# Altium PCB Sinistro_CLK_RevA.PcbDoc (part 4 of 6)
Units mil, origin at the board's own origin, x right, y up, seen from the top; angles counter-clockwise.
Board outline 5905.51 x 4330.71 mil, 10 copper layers (Top Layer (.GTL), MidLayer1 (*.G1), +12V (*.GP1), -12V (*.GP2), A & GND (*.GP3), Chassis E (*.GP4), +28V & VCC (*.GP5), MidLayer2 (*.G2), MidLayer3 (*.G3), Bottom Layer (.GBL)), stack 64.6 mil thick; 481 components, 323 nets, 1881 pads, 926 vias.
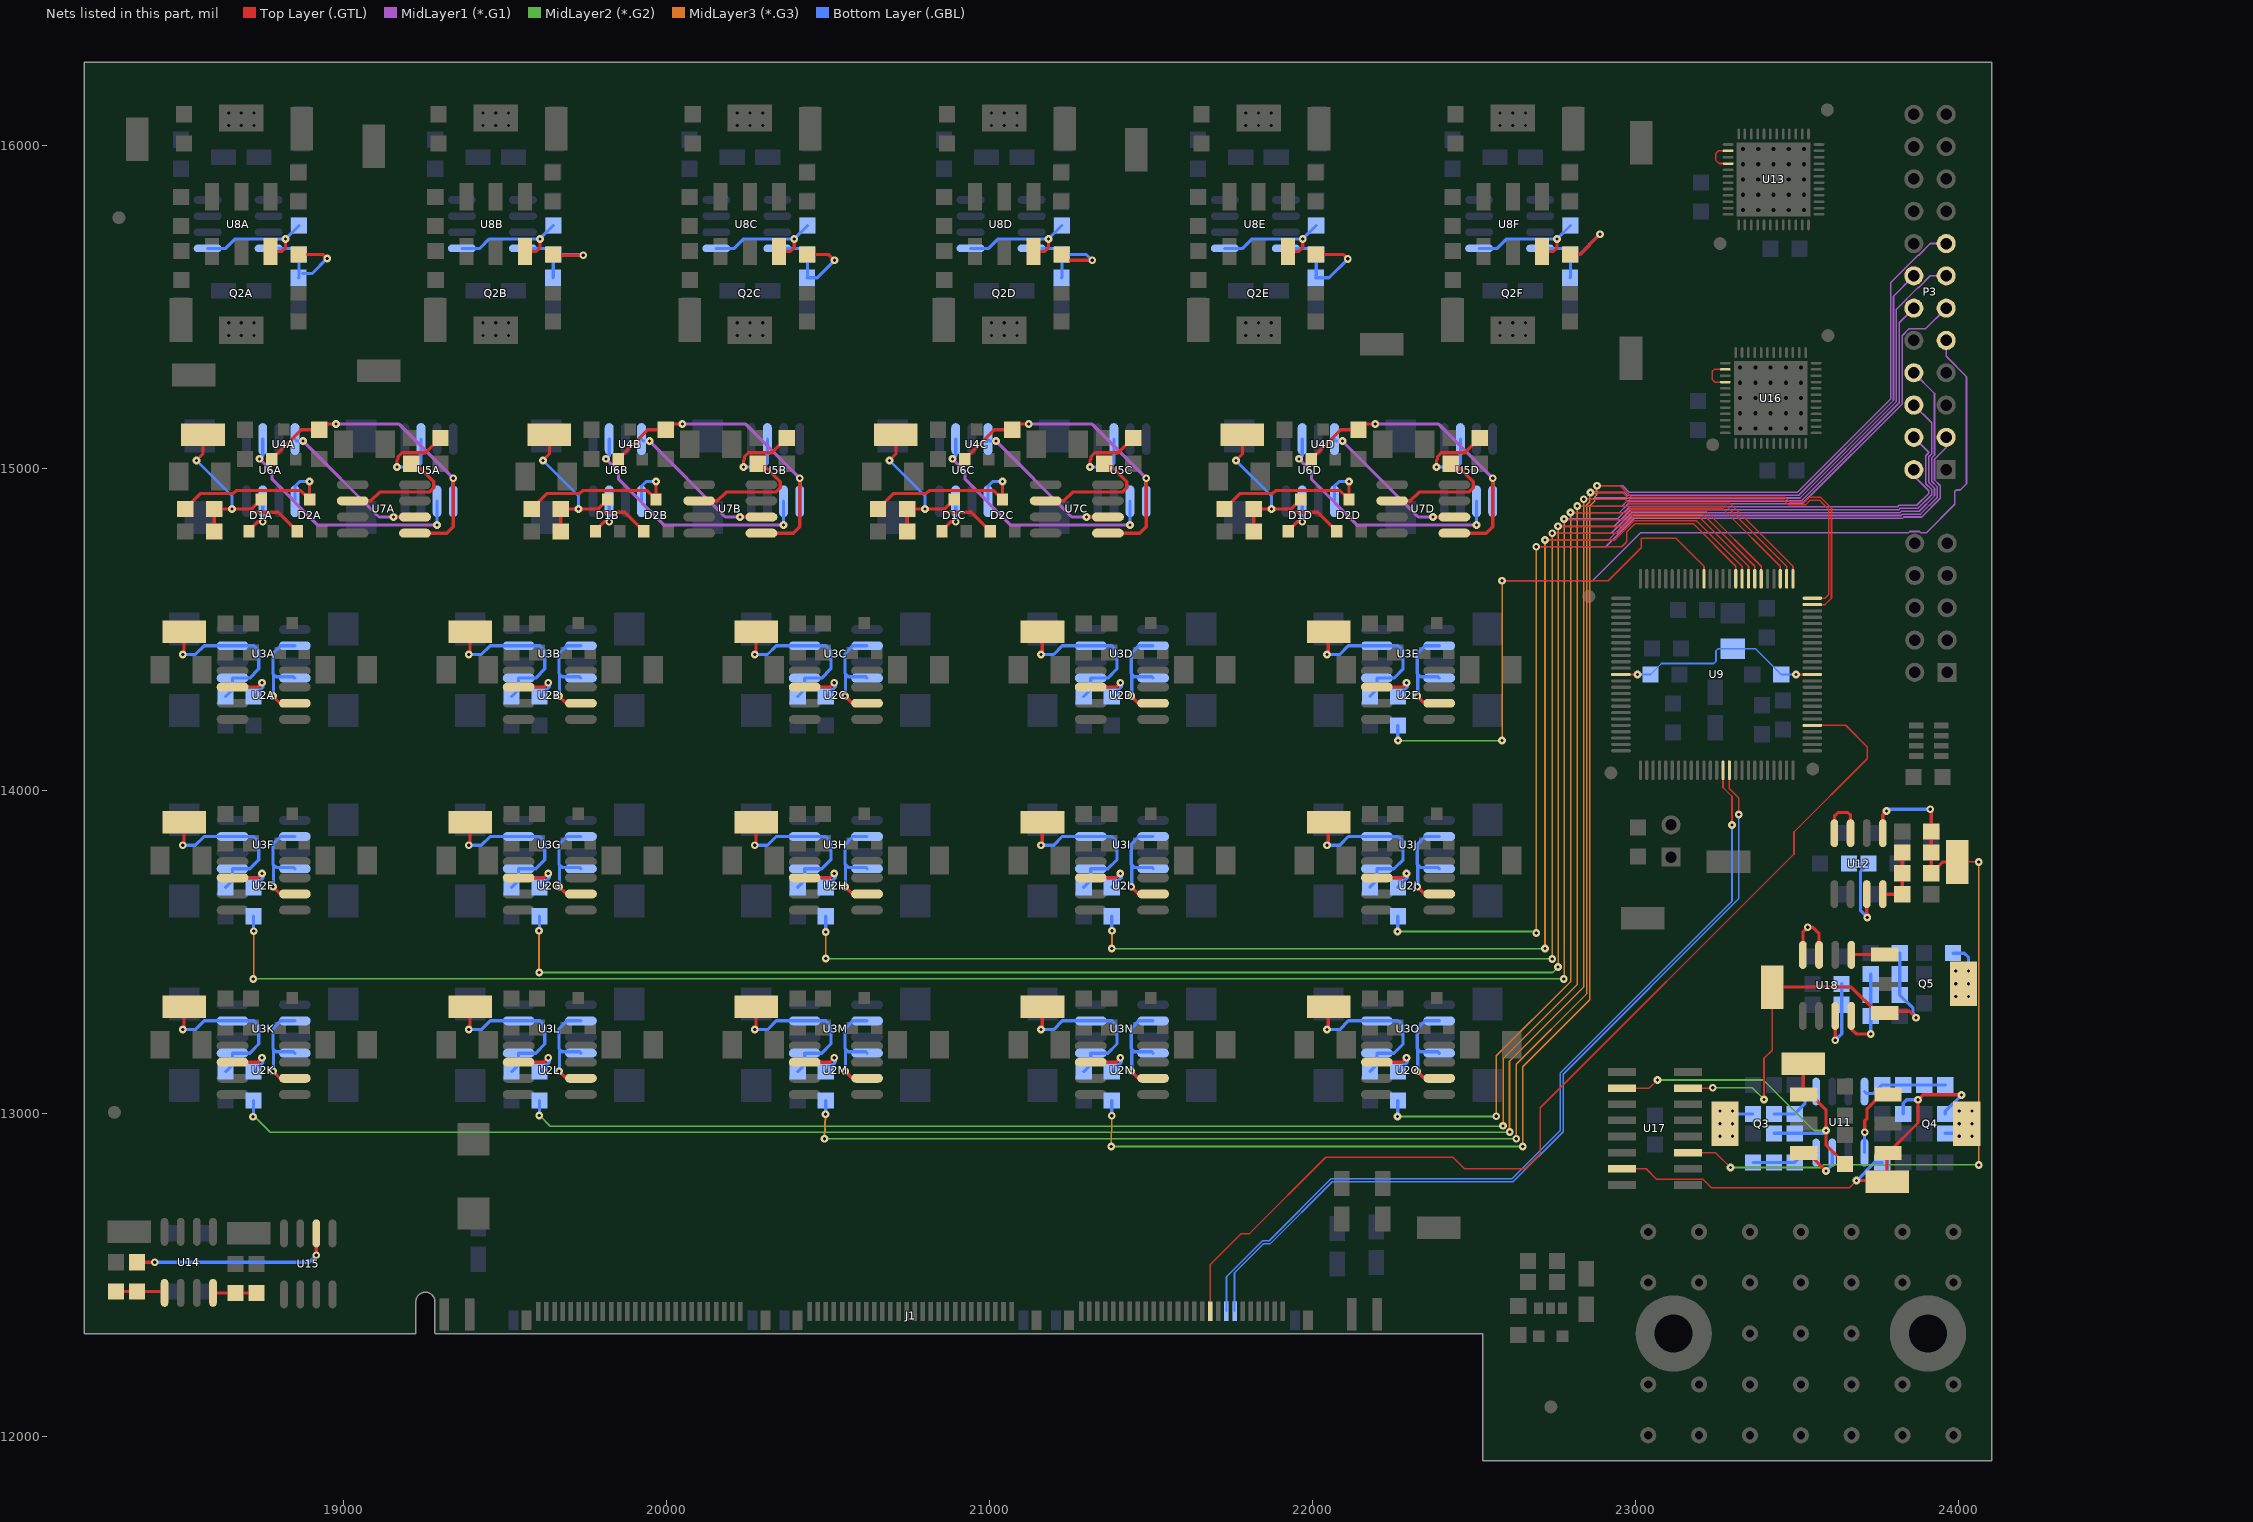
[diagram p12: the nets of this part, all layers, seen from the top]

## Via types
v1: diameter 24, hole 10, Top Layer (.GTL) to Bottom Layer (.GBL), 926 vias

## Nets (pads, with @x,y where several pads share a name; then routed paths per layer and width w, separated by ;. In a path a pad name is that pad's centre, name@x,y a point inside that pad or via, vN(x,y) a via of type N, cw(c..) or ccw(c..) an arc to the next point about the centre after c; other vN are vias at no path point) (continued)
NetC15A_1: C15A.1 R9A.2 R10A.1 U8A.4 | length 362.7
  Top Layer (.GTL) w10: R10A.1@18861.46,15660.83 18938.17,15660.83 v1(18950,15649)
  Bottom Layer (.GBL) w10: U8A.4@18768.94,15680.04 18843.67,15680.04 C15A.1@18862.88,15660.83 18862.88,15590.55 R9A.2@18861.46,15589.13 ; R9A.2@18874.33,15602 18903,15602 v1(18950,15649)
NetC15A_2: C15A.2 Q2A.1 U8A.5 | length 390.6
  Top Layer (.GTL) w10: Q2A.1@18774.85,15670.4 18809.5,15670.39 18821.28,15682.18 v1(18821.28,15709.23)
  Bottom Layer (.GBL) w10: U8A.5@18579.97,15680.04 18635.87,15680.04 18665.06,15709.23 v1(18821.28,15709.23) C15A.2@18862.88,15750.83
NetC15B_1: C15B.1 R9B.2 R10B.1 U8B.4 | length 362.5
  Top Layer (.GTL) w10: R10B.1@19648.87,15660.83 19650.69,15659 v1(19743,15659)
  Bottom Layer (.GBL) w10: U8B.4@19556.35,15680.04 19631.07,15680.04 C15B.1@19650.28,15660.83 ; R9B.2@19648.87,15589.13 19650.28,15590.55 C15B.1@19650.28,15660.83 ; v1(19743,15659) 19741.17,15660.83 C15B.1@19650.28,15660.83
NetC15B_2: C15B.2 Q2B.1 U8B.5 | length 390.6
  Top Layer (.GTL) w10: Q2B.1@19562.25,15670.4 19596.9,15670.39 19608.68,15682.18 v1(19608.68,15709.23)
  Bottom Layer (.GBL) w10: U8B.5@19367.37,15680.04 19423.28,15680.04 19452.46,15709.23 v1(19608.68,15709.23) C15B.2@19650.28,15750.83
NetC15C_1: C15C.1 R9C.2 R10C.1 U8C.4 | length 373.3
  Top Layer (.GTL) w10: R10C.1@20436.27,15660.83 20503.17,15660.83 v1(20521,15643)
  Bottom Layer (.GBL) w10: U8C.4@20343.75,15680.04 20418.47,15680.04 C15C.1@20437.68,15660.83 20437.68,15590.55 R9C.2@20436.27,15589.13 20467.13,15589.13 v1(20521,15643)
NetC15C_2: C15C.2 Q2C.1 U8C.5 | length 390.6
  Top Layer (.GTL) w10: Q2C.1@20349.65,15670.4 20384.3,15670.39 20396.08,15682.18 v1(20396.08,15709.23)
  Bottom Layer (.GBL) w10: U8C.5@20154.77,15680.04 20210.68,15680.04 20239.87,15709.23 v1(20396.08,15709.23) C15C.2@20437.68,15750.83
NetC15D_1: C15D.1 R9D.2 R10D.1 U8D.4 | length 378.2
  Top Layer (.GTL) w10: R10D.1@21223.67,15660.83 21241.5,15643 v1(21319,15643)
  Bottom Layer (.GBL) w10: U8D.4@21131.15,15680.04 21205.87,15680.04 C15D.1@21225.08,15660.83 ; R9D.2@21223.67,15589.13 21225.08,15590.55 C15D.1@21225.08,15660.83 ; v1(21319,15643) 21301.17,15660.83 C15D.1@21225.08,15660.83
NetC15D_2: C15D.2 Q2D.1 U8D.5 | length 390.6
  Top Layer (.GTL) w10: Q2D.1@21137.06,15670.4 21171.7,15670.39 21183.49,15682.18 v1(21183.49,15709.23)
  Bottom Layer (.GBL) w10: U8D.5@20942.17,15680.04 20998.08,15680.04 21027.27,15709.23 v1(21183.49,15709.23) C15D.2@21225.08,15750.83
NetC15E_1: C15E.1 R9E.2 R10E.1 U8E.4 | length 402.3
  Top Layer (.GTL) w10: R10E.1@22011.07,15660.83 22097.17,15660.83 v1(22110,15648)
  MidLayer1 (*.G1) w10: v1(22110,15647) v1(22110,15648)
  Bottom Layer (.GBL) w10: U8E.4@21918.55,15680.04 21993.27,15680.04 C15E.1@22012.49,15660.83 22012.49,15590.55 R9E.2@22011.07,15589.13 22052.13,15589.13 v1(22110,15647)
NetC15E_2: C15E.2 Q2E.1 U8E.5 | length 390.6
  Top Layer (.GTL) w10: Q2E.1@21924.46,15670.4 21959.1,15670.39 21970.89,15682.18 v1(21970.89,15709.23)
  Bottom Layer (.GBL) w10: U8E.5@21729.58,15680.04 21785.48,15680.04 21814.67,15709.23 v1(21970.89,15709.23) C15E.2@22012.49,15750.83
NetC15F_1: C15F.1 R9F.2 R10F.1 U8F.4 | length 410.1
  Top Layer (.GTL) w10: R10F.1@22798.47,15660.83 22827.83,15660.83 v1(22891,15724)
  Bottom Layer (.GBL) w10: U8F.4@22705.95,15680.04 22780.67,15680.04 C15F.1@22799.89,15660.83 ; R9F.2@22798.47,15589.13 22799.89,15590.55 C15F.1@22799.89,15660.83 ; v1(22891,15724) 22827.83,15660.83 C15F.1@22799.89,15660.83
NetC15F_2: C15F.2 Q2F.1 U8F.5 | length 390.6
  Top Layer (.GTL) w10: Q2F.1@22711.86,15670.39 22746.5,15670.39 22758.29,15682.18 v1(22758.29,15709.23)
  Bottom Layer (.GBL) w10: U8F.5@22516.97,15680.04 22572.88,15680.04 22602.07,15709.23 v1(22758.29,15709.23) C15F.2@22799.89,15750.83
NetC26_2: C26.2 C31.2 L5.1 U9.13 U9.63 | length 677.5
  Top Layer (.GTL) w5: U9.13@22956.15,14360.63 v1(23007.41,14360.63) ; v1(23498.41,14360.63) U9.63@23548.67,14360.63
  Bottom Layer (.GBL) w5: v1(23007.41,14360.63) C26.2@23047.41,14360.63 23081.41,14394.63 23243.41,14394.63 23250.41,14401.63 23250.41,14433.63 23257.41,14440.63 L5.1@23302.41,14440.63 23372.41,14440.63 C31.2@23452.41,14360.63 v1(23498.41,14360.63)
NetC28_1: C28.1 R18.1 R19.2 R27.2 U11.4 | length 263.4
  Bottom Layer (.GBL) w10: U11.4@23710.22,13069.41 23716.08,13063.54 23738.84,13063.54 R27.2@23765.22,13089.92 R18.1@23830.21,13089.92 C28.1@23960.21,13089.92
NetC28_2: C28.2 Q4.3 R18.2 R34.1 TP6.1 U17.7 | length 1556.7
  Top Layer (.GTL) w5: U17.7@22958.95,12830 23034,12830 23065.69,12798.31 23209.67,12798.31 23236.48,12771.5 23663.67,12771.5 v1(23685.72,12793.54)
  Top Layer (.GTL) w10: v1(23685.72,12793.54) 23776.59,12793.54 TP6.1@23780.21,12789.92 23780.21,12876.42 Q4.3@23783.17,12879.37 23875.72,12971.92 v1(23875.72,13043.54) 23891.72,13059.54 24009.72,13059.54 v1(24010.72,13058.54)
  Bottom Layer (.GBL) w10: v1(23685.72,12793.54) 23742.09,12849.92 R34.1@23765.22,12849.92 ; R18.2@23830.21,12999.92 23830.21,13033.04 23840.72,13043.54 v1(23875.72,13043.54) ; C28.2@23960.21,12999.92 23960.21,13008.04 v1(24010.72,13058.54)
NetC29_1: C29.1 R15.1 R16.2 U11.8 | length 207.6
  Bottom Layer (.GBL) w10: R16.2@23365.21,12849.92 C29.1@23430.22,12849.92 R15.1@23494.19,12849.92 23524.7,12880.43 U11.8@23560.22,12880.43
NetC29_2: C29.2 Q3.3 R15.2 R31.2 TP5.1 U17.2 | length 1247.5
  Top Layer (.GTL) w5: U17.2@22958.95,13080 23044,13080 v1(23069,13105)
  Top Layer (.GTL) w10: TP5.1@23520.21,13154.92 23520.21,13062.52 Q3.3@23522.26,13060.47 23543.79,13060.47 23590.72,13013.54 v1(23590.72,12948.54) 23590.72,12904.42 R31.2@23650.22,12844.92
  MidLayer2 (*.G2) w5: v1(23069,13105) 23397,13105 23553.46,12948.54 v1(23590.72,12948.54)
  Bottom Layer (.GBL) w10: C29.2@23430.22,12939.92 R15.2@23494.19,12939.92 23582.09,12939.92 v1(23590.72,12948.54)
NetC30_1: C30.1 R21.1 R22.2 U12.4 | length 190.2
  Top Layer (.GTL) w5: U12.4@23767,13680.51 U12.4@23767.51,13680
  Top Layer (.GTL) w10: U12.4@23767.51,13680 R22.2@23827,13680 R21.1@23827,13745 C30.1@23827,13810
NetC30_2: C30.2 R21.2 R36.2 TP7.1 U12.5 U17.11 | length 2432.9
  Top Layer (.GTL) w5: U17.11@23163.67,12880 23249,12880 v1(23295,12834) ; TP7.1@23997,13780 23998,13781 v1(24064,13780)
  Top Layer (.GTL) w10: U12.5@23767,13869.49 23767,13926.77 v1(23778.46,13938.23) ; v1(23913.46,13943.23) 23917,13939.68 23917,13919.68 R36.2@23917,13875 C30.2@23917,13810 R21.2@23917,13745 23952,13780 TP7.1@23997,13780
  MidLayer2 (*.G2) w5: v1(23295,12834) 23575.01,12834 23583.05,12842.04 v1@24064,12842.04
  MidLayer3 (*.G3) w5: v1(24064,12842) v1(24064,13780)
  Bottom Layer (.GBL) w10: v1(23778.46,13938.23) 23783.46,13943.23 v1(23913.46,13943.23)
NetC37A_2: C37A.2 U4A.1 U5A.5 U7A.5 | length 1038
  Top Layer (.GTL) w10: U4A.1@18778,15027.05 18869.26,15118.31 C37A.2@18925.4,15118.31 ; C37A.2@18934.4,15127.31 C37A.2@18925.4,15118.31 ; v1(18977,15136) 18943.09,15136 C37A.2@18925.4,15118.31 ; U7A.5@19221.86,14798.31 19320.4,14798.31 19340.4,14818.31 v1(19340.4,14968.31)
  MidLayer1 (*.G1) w10: v1(18977,15136) 19172.71,15136 v1(19340.4,14968.31)
  Bottom Layer (.GBL) w10: U5A.5@19340.4,14896.85 v1(19340.4,14968.31)
NetC37B_2: C37B.2 U4B.1 U5B.5 U7B.5 | length 1038
  Top Layer (.GTL) w10: U4B.1@19850.83,15027.05 19942.09,15118.31 C37B.2@19998.24,15118.31 ; C37B.2@20007.24,15127.31 C37B.2@19998.24,15118.31 ; v1(20049.83,15136) 20015.93,15136 C37B.2@19998.24,15118.31 ; U7B.5@20294.69,14798.31 20393.24,14798.31 20413.24,14818.31 v1(20413.24,14968.31)
  MidLayer1 (*.G1) w10: v1(20049.83,15136) 20245.54,15136 v1(20413.24,14968.31)
  Bottom Layer (.GBL) w10: U5B.5@20413.24,14896.85 v1(20413.24,14968.31)
NetC37C_2: C37C.2 U4C.1 U5C.5 U7C.5 | length 1038
  Top Layer (.GTL) w10: U4C.1@20923.67,15027.05 21014.93,15118.31 C37C.2@21071.07,15118.31 ; C37C.2@21080.07,15127.31 C37C.2@21071.07,15118.31 ; v1(21122.67,15136) 21088.76,15136 C37C.2@21071.07,15118.31 ; U7C.5@21367.53,14798.31 21466.07,14798.31 21486.07,14818.31 v1(21486.07,14968.31)
  MidLayer1 (*.G1) w10: v1(21122.67,15136) 21318.38,15136 v1(21486.07,14968.31)
  Bottom Layer (.GBL) w10: U5C.5@21486.07,14896.85 v1(21486.07,14968.31)
NetC37D_2: C37D.2 U4D.1 U5D.5 U7D.5 | length 1038
  Top Layer (.GTL) w10: U4D.1@21996.5,15027.05 22087.76,15118.31 C37D.2@22143.91,15118.31 ; C37D.2@22152.91,15127.31 C37D.2@22143.91,15118.31 ; v1(22195.5,15136) 22161.6,15136 C37D.2@22143.91,15118.31 ; U7D.5@22440.36,14798.31 22538.91,14798.31 22558.91,14818.31 v1(22558.91,14968.31)
  MidLayer1 (*.G1) w10: v1(22195.5,15136) 22391.21,15136 v1(22558.91,14968.31)
  Bottom Layer (.GBL) w10: U5D.5@22558.91,14896.85 v1(22558.91,14968.31)
NetC39_1: C39.1 R37.1 R40.2 U18.4 | length 291.7
  Top Layer (.GTL) w10: U18.4@23669.46,13303.35 23669.46,13262.83 23684.46,13247.84 v1(23729.46,13247.84)
  Bottom Layer (.GBL) w10: v1(23729.46,13247.84) R37.1@23729.46,13367.84 C39.1@23729.46,13432.84
NetC39_2: C39.2 Q5.3 R37.2 R43.2 TP8.1 U17.15 | length 1318.7
  Top Layer (.GTL) w5: U17.15@23163.67,13080 23239,13080 v1(23240,13081) ; v1(23399,13045) 23399,13172 23424.46,13197.46 TP8.1@23424.46,13392.84
  Top Layer (.GTL) w10: TP8.1@23424.46,13392.84 23669.46,13392.84 23744.46,13317.84 23766.86,13317.84 Q5.3@23772.41,13312.28 23777.96,13317.84 23849.46,13317.84 v1(23869.46,13297.84)
  MidLayer2 (*.G2) w5: v1(23240,13081) 23363,13081 v1(23399,13045)
  Bottom Layer (.GBL) w10: R43.2@23819.46,13497.84 R37.2@23819.46,13367.84 23860.46,13326.84 23860.46,13311.84 23869.46,13302.84 v1(23869.46,13297.84)
NetC42_2: C42.2 R47.1 U14.1 | length 151.9
  Top Layer (.GTL) w10: C42.2@18296.47,12450.51 R47.1@18361.46,12450.51 18441.98,12450.51 U14.1@18446.47,12446.02
NetD1A_1: D1A.1 U6A.7 | length 119.1
  Top Layer (.GTL) w10: D1A.1@18708,14804.1 18708,14805.91 18735.4,14833.31 v1(18750.4,14833.31)
  Bottom Layer (.GBL) w10: v1(18750.4,14833.31) U6A.7@18750.4,14896.85
NetD1A_3: D1A.3 D2A.1 R4A.1 R5A.2 TP4A.1 | length 684.8
  Top Layer (.GTL) w10: v1(18545.4,15023.31) 18565.4,15043.31 TP4A.1@18565.4,15103.31 ; R4A.1@18600.4,14803.31 R5A.2@18600.4,14873.31 18716.19,14873.31 ; D1A.3@18745.4,14902.52 18716.19,14873.31 ; D2A.1@18858,14804.1 18798.79,14863.31 18720.4,14863.31 18716.19,14867.52 18716.19,14873.31
  Bottom Layer (.GBL) w10: v1(18545.4,15023.31) 18655.4,14913.31 v1(18655.4,14873.31)
NetD1B_1: D1B.1 U6B.7 | length 119.1
  Top Layer (.GTL) w10: D1B.1@19780.83,14804.1 19780.83,14805.91 19808.24,14833.31 v1(19823.24,14833.31)
  Bottom Layer (.GBL) w10: v1(19823.24,14833.31) U6B.7@19823.24,14896.85
NetD1B_3: D1B.3 D2B.1 R4B.1 R5B.2 TP4B.1 | length 684.8
  Top Layer (.GTL) w10: v1(19618.24,15023.31) 19638.24,15043.31 TP4B.1@19638.24,15103.31 ; R4B.1@19673.24,14803.31 R5B.2@19673.24,14873.31 19789.02,14873.31 ; D1B.3@19818.24,14902.52 19789.02,14873.31 ; D2B.1@19930.83,14804.1 19871.62,14863.31 19793.24,14863.31 19789.02,14867.52 19789.02,14873.31
  Bottom Layer (.GBL) w10: v1(19618.24,15023.31) 19728.24,14913.31 v1(19728.24,14873.31)
NetD1C_1: D1C.1 U6C.7 | length 119.1
  Top Layer (.GTL) w10: D1C.1@20853.67,14804.1 20853.67,14805.91 20881.07,14833.31 v1(20896.07,14833.31)
  Bottom Layer (.GBL) w10: v1(20896.07,14833.31) U6C.7@20896.07,14896.85
NetD1C_3: D1C.3 D2C.1 R4C.1 R5C.2 TP4C.1 | length 684.8
  Top Layer (.GTL) w10: v1(20691.07,15023.31) 20711.07,15043.31 TP4C.1@20711.07,15103.31 ; R4C.1@20746.07,14803.31 R5C.2@20746.07,14873.31 20861.86,14873.31 ; D1C.3@20891.07,14902.52 20861.86,14873.31 ; D2C.1@21003.67,14804.1 20944.46,14863.31 20866.07,14863.31 20861.86,14867.52 20861.86,14873.31
  Bottom Layer (.GBL) w10: v1(20691.07,15023.31) 20801.07,14913.31 v1(20801.07,14873.31)
NetD1D_1: D1D.1 U6D.7 | length 119.1
  Top Layer (.GTL) w10: D1D.1@21926.5,14804.1 21926.5,14805.91 21953.91,14833.31 v1(21968.91,14833.31)
  Bottom Layer (.GBL) w10: v1(21968.91,14833.31) U6D.7@21968.91,14896.85
NetD1D_3: D1D.3 D2D.1 R4D.1 R5D.2 TP4D.1 | length 684.8
  Top Layer (.GTL) w10: v1(21763.91,15023.31) 21783.91,15043.31 TP4D.1@21783.91,15103.31 ; R4D.1@21818.91,14803.31 R5D.2@21818.91,14873.31 21934.69,14873.31 ; D1D.3@21963.91,14902.52 21934.69,14873.31 ; D2D.1@22076.5,14804.1 22017.29,14863.31 21938.91,14863.31 21934.69,14867.52 21934.69,14873.31
  Bottom Layer (.GBL) w10: v1(21763.91,15023.31) 21873.91,14913.31 v1(21873.91,14873.31)
NetD2A_3: D2A.3 R5A.1 U6A.5 | length 573.5
  Top Layer (.GTL) w10: R5A.1@18510.4,14873.31 18558.4,14921.31 18659.4,14921.31 18668.31,14930.22 18867.7,14930.22 D2A.3@18895.4,14902.52 v1(18895.4,14958.31)
  Bottom Layer (.GBL) w10: U6A.5@18850.4,14896.85 18850.4,14943.31 18865.4,14958.31 v1(18895.4,14958.31)
NetD2B_3: D2B.3 R5B.1 U6B.5 | length 573.5
  Top Layer (.GTL) w10: R5B.1@19583.24,14873.31 19631.24,14921.31 19732.24,14921.31 19741.15,14930.22 19940.54,14930.22 D2B.3@19968.24,14902.52 v1(19968.24,14958.31)
  Bottom Layer (.GBL) w10: U6B.5@19923.24,14896.85 19923.24,14943.31 19938.24,14958.31 v1(19968.24,14958.31)
NetD2C_3: D2C.3 R5C.1 U6C.5 | length 573.5
  Top Layer (.GTL) w10: R5C.1@20656.07,14873.31 20704.07,14921.31 20805.07,14921.31 20813.98,14930.22 21013.37,14930.22 D2C.3@21041.07,14902.52 v1(21041.07,14958.31)
  Bottom Layer (.GBL) w10: U6C.5@20996.07,14896.85 20996.07,14943.31 21011.07,14958.31 v1(21041.07,14958.31)
NetD2D_3: D2D.3 R5D.1 U6D.5 | length 573.5
  Top Layer (.GTL) w10: R5D.1@21728.91,14873.31 21776.91,14921.31 21877.91,14921.31 21886.82,14930.22 22086.2,14930.22 D2D.3@22113.91,14902.52 v1(22113.91,14958.31)
  Bottom Layer (.GBL) w10: U6D.5@22068.91,14896.85 22068.91,14943.31 22083.91,14958.31 v1(22113.91,14958.31)
NetQ3_1: Q3.1 U11.7 | length 156.5
  Top Layer (.GTL) w10: Q3.1@23522.26,12879.37 23534.89,12879.37 v1(23590.72,12823.54)
  Bottom Layer (.GBL) w10: v1(23590.72,12823.54) 23610.22,12843.04 U11.7@23610.22,12880.43
NetQ3_4: Q3.4 R30.1 | length 67.3
  Bottom Layer (.GBL) w10: Q3.4@23301.79,13009.29 23311.16,12999.92 R30.1@23365.22,12999.92
NetQ4_1: Q4.1 U11.5 | length 222.3
  Top Layer (.GTL) w10: v1(23710.72,12943.54) 23710.72,12978.85 23718.09,12986.22 23718.09,13015.92 23762.65,13060.47 Q4.1@23783.17,13060.47
  Bottom Layer (.GBL) w10: U11.5@23710.22,12880.43 23710.22,12943.04 v1(23710.72,12943.54)
NetQ4_4: Q4.4 R33.1 | length 47.3
  Bottom Layer (.GBL) w10: R33.1@23960.21,12939.92 23994.27,12939.92 Q4.4@24003.64,12930.55
NetQ5_1: Q5.1 U18.5 | length 103.4
  Top Layer (.GTL) w10: U18.5@23669.46,13492.32 23670.52,13493.39 Q5.1@23772.41,13493.39
NetQ5_4: Q5.4 R39.1 | length 95.9
  Bottom Layer (.GBL) w10: R39.1@23984.46,13497.84 24019.45,13497.84 24032.25,13485.04 Q5.4@24032.25,13442.21
NetR1A_2: R1A.2 U2A.2 | length 159.1
  Top Layer (.GTL) w10: U2A.2@18656.98,14321.65 18735.13,14321.65 v1@18748.59,14335.11
  Bottom Layer (.GBL) w10: R1A.2@18721.94,14292.44 18751.46,14321.97 18751.46,14337.99 v1@18748.59,14335.11
  other v1: 18748.57,14335.11
NetR1B_2: R1B.2 U2B.2 | length 159.1
  Top Layer (.GTL) w10: U2B.2@19542.8,14321.66 19620.95,14321.65 v1(19634.4,14335.11)
  Bottom Layer (.GBL) w10: R1B.2@19607.76,14292.44 19637.29,14321.97 19637.29,14337.99 v1(19634.4,14335.11)
NetR1C_2: R1C.2 U2C.2 | length 159.1
  Top Layer (.GTL) w10: U2C.2@20428.63,14321.65 20506.78,14321.65 v1(20520.22,14335.11)
  Bottom Layer (.GBL) w10: R1C.2@20493.59,14292.44 20523.12,14321.97 20523.12,14337.99 v1(20520.22,14335.11)
NetR1D_2: R1D.2 U2D.2 | length 159.1
  Top Layer (.GTL) w10: U2D.2@21314.46,14321.65 21392.61,14321.65 v1(21406.05,14335.11)
  Bottom Layer (.GBL) w10: R1D.2@21379.42,14292.44 21408.94,14321.97 21408.94,14337.99 v1(21406.05,14335.11)
NetR1E_2: R1E.2 U2E.2 | length 159.1
  Top Layer (.GTL) w10: U2E.2@22200.28,14321.66 22278.43,14321.65 v1@22291.89,14335.11
  Bottom Layer (.GBL) w10: R1E.2@22265.24,14292.44 22294.77,14321.97 22294.77,14337.99 v1@22291.89,14335.11
  other v1: 22291.88,14335.11
NetR1F_2: R1F.2 U2F.2 | length 159.1
  Top Layer (.GTL) w10: U2F.2@18656.98,13731.1 18735.13,13731.1 v1@18748.59,13744.56
  Bottom Layer (.GBL) w10: R1F.2@18721.94,13701.89 18751.46,13731.42 18751.46,13747.44 v1@18748.59,13744.56
  other v1: 18748.57,13744.56
NetR1G_2: R1G.2 U2G.2 | length 159.1
  Top Layer (.GTL) w10: U2G.2@19542.8,13731.1 19620.95,13731.1 v1(19634.4,13744.56)
  Bottom Layer (.GBL) w10: R1G.2@19607.76,13701.89 19637.29,13731.42 19637.29,13747.44 v1(19634.4,13744.56)
NetR1H_2: R1H.2 U2H.2 | length 159.1
  Top Layer (.GTL) w10: U2H.2@20428.63,13731.1 20506.78,13731.1 v1(20520.22,13744.56)
  Bottom Layer (.GBL) w10: R1H.2@20493.59,13701.89 20523.12,13731.42 20523.12,13747.44 v1(20520.22,13744.56)
NetR1I_2: R1I.2 U2I.2 | length 159.1
  Top Layer (.GTL) w10: U2I.2@21314.46,13731.1 21392.61,13731.1 v1(21406.05,13744.56)
  Bottom Layer (.GBL) w10: R1I.2@21379.42,13701.89 21408.94,13731.42 21408.94,13747.44 v1(21406.05,13744.56)
NetR1J_2: R1J.2 U2J.2 | length 159.1
  Top Layer (.GTL) w10: U2J.2@22200.28,13731.1 22278.43,13731.1 v1@22291.89,13744.56
  Bottom Layer (.GBL) w10: R1J.2@22265.24,13701.89 22294.77,13731.42 22294.77,13747.44 v1@22291.89,13744.56
  other v1: 22291.88,13744.56
NetR1K_2: R1K.2 U2K.2 | length 159.1
  Top Layer (.GTL) w10: U2K.2@18656.97,13160.24 18735.13,13160.24 v1@18748.59,13173.69
  Bottom Layer (.GBL) w10: R1K.2@18721.94,13131.02 18751.46,13160.55 18751.46,13176.57 v1@18748.59,13173.69
  other v1: 18748.57,13173.69
NetR1L_2: R1L.2 U2L.2 | length 159.1
  Top Layer (.GTL) w10: U2L.2@19542.8,13160.24 19620.95,13160.24 v1(19634.4,13173.69)
  Bottom Layer (.GBL) w10: R1L.2@19607.76,13131.02 19637.29,13160.55 19637.29,13176.57 v1(19634.4,13173.69)
NetR1M_2: R1M.2 U2M.2 | length 159.1
  Top Layer (.GTL) w10: U2M.2@20428.63,13160.24 20506.78,13160.24 v1(20520.22,13173.69)
  Bottom Layer (.GBL) w10: R1M.2@20493.59,13131.02 20523.12,13160.55 20523.12,13176.57 v1(20520.22,13173.69)
NetR1N_2: R1N.2 U2N.2 | length 159.1
  Top Layer (.GTL) w10: U2N.2@21314.46,13160.24 21392.61,13160.24 v1(21406.05,13173.69)
  Bottom Layer (.GBL) w10: R1N.2@21379.42,13131.02 21408.94,13160.55 21408.94,13176.57 v1(21406.05,13173.69)
NetR1O_2: R1O.2 U2O.2 | length 159.1
  Top Layer (.GTL) w10: U2O.2@22200.28,13160.24 22278.43,13160.24 v1@22291.89,13173.69
  Bottom Layer (.GBL) w10: R1O.2@22265.24,13131.02 22294.77,13160.55 22294.77,13176.57 v1@22291.89,13173.69
  other v1: 22291.88,13173.69
NetR2A_1: R2A.1 TP3A.1 U3A.5 U3A.7 | length 543.7
  Top Layer (.GTL) w10: v1(18502.5,14422.72) 18506.31,14422.72 18506.39,14422.64 18506.39,14492.52 TP3A.1@18507.37,14493.5
  Bottom Layer (.GBL) w10: v1(18502.5,14422.72) 18503.48,14422.72 18503.56,14422.64 18541.82,14422.64 18568.79,14449.61 U3A.7@18656.98,14449.61 18722.53,14449.61 18738.19,14433.94 18738.19,14377.87 18709.93,14349.61 U3A.5@18656.98,14349.61 18656.98,14314.09 R2A.1@18635.32,14292.44
NetR2B_1: R2B.1 TP3B.1 U3B.5 U3B.7 | length 543.7
  Top Layer (.GTL) w10: v1(19388.32,14422.72) 19392.13,14422.72 19392.21,14422.64 19392.21,14492.52 TP3B.1@19393.2,14493.5
  Bottom Layer (.GBL) w10: v1(19388.32,14422.72) 19389.31,14422.72 19389.38,14422.64 19427.65,14422.64 19454.61,14449.61 U3B.7@19542.8,14449.61 19608.35,14449.61 19624.01,14433.94 19624.01,14377.87 19595.76,14349.61 U3B.5@19542.8,14349.61 19542.8,14314.09 R2B.1@19521.15,14292.44
NetR2C_1: R2C.1 TP3C.1 U3C.5 U3C.7 | length 543.7
  Top Layer (.GTL) w10: v1(20274.15,14422.72) 20277.96,14422.72 20278.04,14422.64 20278.04,14492.52 TP3C.1@20279.02,14493.5
  Bottom Layer (.GBL) w10: v1(20274.15,14422.72) 20275.13,14422.72 20275.21,14422.64 20313.47,14422.64 20340.44,14449.61 U3C.7@20428.63,14449.61 20494.18,14449.61 20509.84,14433.94 20509.84,14377.87 20481.58,14349.61 U3C.5@20428.63,14349.61 20428.63,14314.09 R2C.1@20406.98,14292.44
NetR2D_1: R2D.1 TP3D.1 U3D.5 U3D.7 | length 543.7
  Top Layer (.GTL) w10: v1(21159.98,14422.72) 21163.79,14422.72 21163.87,14422.64 21163.87,14492.52 TP3D.1@21164.85,14493.5
  Bottom Layer (.GBL) w10: v1(21159.98,14422.72) 21160.96,14422.72 21161.04,14422.64 21199.3,14422.64 21226.27,14449.61 U3D.7@21314.46,14449.61 21380.01,14449.61 21395.67,14433.94 21395.67,14377.87 21367.41,14349.61 U3D.5@21314.46,14349.61 21314.46,14314.09 R2D.1@21292.8,14292.44
NetR2E_1: R2E.1 TP3E.1 U3E.5 U3E.7 | length 543.7
  Top Layer (.GTL) w10: v1(22045.8,14422.72) 22049.62,14422.72 22049.69,14422.64 22049.69,14492.52 TP3E.1@22050.68,14493.5
  Bottom Layer (.GBL) w10: v1(22045.8,14422.72) 22046.79,14422.72 22046.87,14422.64 22085.13,14422.64 22112.1,14449.61 U3E.7@22200.28,14449.61 22265.84,14449.61 22281.5,14433.94 22281.5,14377.87 22253.24,14349.61 U3E.5@22200.28,14349.61 22200.28,14314.09 R2E.1@22178.63,14292.44
NetR2F_1: R2F.1 TP3F.1 U3F.5 U3F.7 | length 543.7
  Top Layer (.GTL) w10: v1(18502.5,13832.16) 18506.31,13832.16 18506.39,13832.09 18506.39,13901.97 TP3F.1@18507.37,13902.95
  Bottom Layer (.GBL) w10: v1(18502.5,13832.16) 18503.48,13832.16 18503.56,13832.09 18541.82,13832.09 18568.79,13859.05 U3F.7@18656.98,13859.05 18722.53,13859.05 18738.19,13843.39 18738.19,13787.31 18709.93,13759.05 U3F.5@18656.98,13759.05 18656.98,13723.54 R2F.1@18635.32,13701.89
NetR2G_1: R2G.1 TP3G.1 U3G.5 U3G.7 | length 543.7
  Top Layer (.GTL) w10: v1(19388.32,13832.16) 19392.13,13832.16 19392.21,13832.09 19392.21,13901.97 TP3G.1@19393.2,13902.95
  Bottom Layer (.GBL) w10: v1(19388.32,13832.16) 19389.31,13832.16 19389.38,13832.09 19427.65,13832.09 19454.61,13859.05 U3G.7@19542.8,13859.05 19608.35,13859.05 19624.01,13843.39 19624.01,13787.31 19595.76,13759.05 U3G.5@19542.8,13759.05 19542.8,13723.54 R2G.1@19521.15,13701.89
NetR2H_1: R2H.1 TP3H.1 U3H.5 U3H.7 | length 543.7
  Top Layer (.GTL) w10: v1(20274.15,13832.16) 20277.96,13832.16 20278.04,13832.09 20278.04,13901.97 TP3H.1@20279.02,13902.95
  Bottom Layer (.GBL) w10: v1(20274.15,13832.16) 20275.13,13832.16 20275.21,13832.09 20313.47,13832.09 20340.44,13859.05 U3H.7@20428.63,13859.05 20494.18,13859.05 20509.84,13843.39 20509.84,13787.31 20481.58,13759.05 U3H.5@20428.63,13759.05 20428.63,13723.54 R2H.1@20406.98,13701.89
NetR2I_1: R2I.1 TP3I.1 U3I.5 U3I.7 | length 543.7
  Top Layer (.GTL) w10: v1(21159.98,13832.16) 21163.79,13832.16 21163.87,13832.09 21163.87,13901.97 TP3I.1@21164.85,13902.95
  Bottom Layer (.GBL) w10: v1(21159.98,13832.16) 21160.96,13832.16 21161.04,13832.09 21199.3,13832.09 21226.27,13859.05 U3I.7@21314.46,13859.05 21380.01,13859.05 21395.67,13843.39 21395.67,13787.31 21367.41,13759.05 U3I.5@21314.46,13759.05 21314.46,13723.54 R2I.1@21292.8,13701.89
NetR2J_1: R2J.1 TP3J.1 U3J.5 U3J.7 | length 543.7
  Top Layer (.GTL) w10: v1(22045.8,13832.16) 22049.62,13832.16 22049.69,13832.09 22049.69,13901.97 TP3J.1@22050.68,13902.95
  Bottom Layer (.GBL) w10: v1(22045.8,13832.16) 22046.79,13832.16 22046.87,13832.09 22085.13,13832.09 22112.1,13859.05 U3J.7@22200.28,13859.05 22265.84,13859.05 22281.5,13843.39 22281.5,13787.31 22253.24,13759.05 U3J.5@22200.28,13759.05 22200.28,13723.54 R2J.1@22178.63,13701.89
NetR2K_1: R2K.1 TP3K.1 U3K.5 U3K.7 | length 543.7
  Top Layer (.GTL) w10: v1(18502.5,13261.3) 18506.31,13261.3 18506.39,13261.22 18506.39,13331.1 TP3K.1@18507.37,13332.09
  Bottom Layer (.GBL) w10: v1(18502.5,13261.3) 18503.48,13261.3 18503.56,13261.22 18541.82,13261.22 18568.79,13288.19 U3K.7@18656.97,13288.19 18722.53,13288.19 18738.19,13272.53 18738.19,13216.45 18709.93,13188.19 U3K.5@18656.97,13188.19 18656.98,13152.68 R2K.1@18635.32,13131.02
NetR2L_1: R2L.1 TP3L.1 U3L.5 U3L.7 | length 543.7
  Top Layer (.GTL) w10: v1(19388.32,13261.3) 19392.13,13261.3 19392.21,13261.22 19392.21,13331.1 TP3L.1@19393.2,13332.09
  Bottom Layer (.GBL) w10: v1(19388.32,13261.3) 19389.31,13261.3 19389.38,13261.22 19427.65,13261.22 19454.61,13288.19 U3L.7@19542.8,13288.19 19608.35,13288.19 19624.01,13272.53 19624.01,13216.45 19595.76,13188.19 U3L.5@19542.8,13188.19 19542.8,13152.68 R2L.1@19521.15,13131.02
NetR2M_1: R2M.1 TP3M.1 U3M.5 U3M.7 | length 543.7
  Top Layer (.GTL) w10: v1(20274.15,13261.3) 20277.96,13261.3 20278.04,13261.22 20278.04,13331.1 TP3M.1@20279.02,13332.09
  Bottom Layer (.GBL) w10: v1(20274.15,13261.3) 20275.13,13261.3 20275.21,13261.22 20313.47,13261.22 20340.44,13288.19 U3M.7@20428.63,13288.19 20494.18,13288.19 20509.84,13272.53 20509.84,13216.45 20481.58,13188.19 U3M.5@20428.63,13188.19 20428.63,13152.68 R2M.1@20406.98,13131.02
NetR2N_1: R2N.1 TP3N.1 U3N.5 U3N.7 | length 543.7
  Top Layer (.GTL) w10: v1(21159.98,13261.3) 21163.79,13261.3 21163.87,13261.22 21163.87,13331.1 TP3N.1@21164.85,13332.09
  Bottom Layer (.GBL) w10: v1(21159.98,13261.3) 21160.96,13261.3 21161.04,13261.22 21199.3,13261.22 21226.27,13288.19 U3N.7@21314.46,13288.19 21380.01,13288.19 21395.67,13272.53 21395.67,13216.45 21367.41,13188.19 U3N.5@21314.46,13188.19 21314.46,13152.68 R2N.1@21292.8,13131.02
NetR2O_1: R2O.1 TP3O.1 U3O.5 U3O.7 | length 543.7
  Top Layer (.GTL) w10: v1(22045.8,13261.3) 22049.62,13261.3 22049.69,13261.22 22049.69,13331.1 TP3O.1@22050.68,13332.09
  Bottom Layer (.GBL) w10: v1(22045.8,13261.3) 22046.79,13261.3 22046.87,13261.22 22085.13,13261.22 22112.1,13288.19 U3O.7@22200.28,13288.19 22265.84,13288.19 22281.5,13272.53 22281.5,13216.45 22253.24,13188.19 U3O.5@22200.28,13188.19 22200.28,13152.68 R2O.1@22178.63,13131.02
NetR3A_2: R3A.2 U5A.2 | length 357.5
  Top Layer (.GTL) w10: v1(19166.5,15003.07) 19166.5,15023.68 19169.4,15026.58 19169.4,15035.04 19181.67,15047.31 19254.4,15047.31 R3A.2@19300.4,15093.31 R3A.2@19300.4,15078.31
  Bottom Layer (.GBL) w10: v1(19166.5,15003.07) 19229.5,15003.07 19240.4,15013.98 U5A.2@19240.4,15089.76
NetR3B_2: R3B.2 U5B.2 | length 357.5
  Top Layer (.GTL) w10: v1(20239.34,15003.07) 20239.34,15023.68 20242.24,15026.58 20242.24,15035.04 20254.51,15047.31 20327.24,15047.31 R3B.2@20373.24,15093.31 R3B.2@20373.24,15078.31
  Bottom Layer (.GBL) w10: v1(20239.34,15003.07) 20302.33,15003.07 20313.24,15013.98 U5B.2@20313.24,15089.76
NetR3C_2: R3C.2 U5C.2 | length 357.5
  Top Layer (.GTL) w10: v1(21312.17,15003.07) 21312.17,15023.68 21315.07,15026.58 21315.07,15035.04 21327.34,15047.31 21400.07,15047.31 R3C.2@21446.07,15093.31 R3C.2@21446.07,15078.31
  Bottom Layer (.GBL) w10: v1(21312.17,15003.07) 21375.17,15003.07 21386.07,15013.98 U5C.2@21386.07,15089.76
NetR3D_2: R3D.2 U5D.2 | length 357.5
  Top Layer (.GTL) w10: v1(22385.01,15003.07) 22385.01,15023.68 22387.91,15026.58 22387.91,15035.04 22400.18,15047.31 22472.91,15047.31 R3D.2@22518.91,15093.31 R3D.2@22518.91,15078.31
  Bottom Layer (.GBL) w10: v1(22385.01,15003.07) 22448,15003.07 22458.91,15013.98 U5D.2@22458.91,15089.76
NetR6A_2: R6A.2 U7A.2 | length 379.5
  Top Layer (.GTL) w10: U7A.2@19028.95,14898.31 19085.4,14898.31 19112.62,14925.53 19266.73,14925.53 19280.07,14938.87 19280.07,14957.74 19224.51,15013.31 R6A.2@19210.4,15013.31
NetR6B_2: R6B.2 U7B.2 | length 379.5
  Top Layer (.GTL) w10: U7B.2@20101.78,14898.31 20158.24,14898.31 20185.46,14925.53 20339.56,14925.53 20352.9,14938.87 20352.9,14957.74 20297.34,15013.31 R6B.2@20283.24,15013.31
NetR6C_2: R6C.2 U7C.2 | length 379.5
  Top Layer (.GTL) w10: U7C.2@21174.62,14898.31 21231.07,14898.31 21258.29,14925.53 21412.4,14925.53 21425.74,14938.87 21425.74,14957.74 21370.18,15013.31 R6C.2@21356.07,15013.31
NetR6D_2: R6D.2 U7D.2 | length 379.5
  Top Layer (.GTL) w10: U7D.2@22247.45,14898.31 22303.91,14898.31 22331.13,14925.53 22485.23,14925.53 22498.57,14938.87 22498.57,14957.74 22443.01,15013.31 R6D.2@22428.91,15013.31
NetR24_2: R24.2 R25.2 U12.3 | length 348.5
  Top Layer (.GTL) w5: v1@23717,13609.68 v1(23718.46,13608.23)
  Top Layer (.GTL) w10: v1@23717,13609.68 U12.3@23717,13680.51
  Bottom Layer (.GBL) w5: R24.2@23662,13775 R25.2@23722,13775 R25.2@23700.5,13753.5
  Bottom Layer (.GBL) w10: v1(23718.46,13608.23) 23698,13628.68 23698,13751 R25.2@23722,13775
NetR28_2: R28.2 R29.2 U11.1 | length 172.9
  Bottom Layer (.GBL) w10: R28.2@23430.21,12999.92 R29.2@23494.19,12999.92 23525.72,13031.45 23525.72,13055.47 23539.65,13069.41 U11.1@23560.22,13069.41
NetR41_2: R41.2 R42.2 U18.3 | length 258.8
  Top Layer (.GTL) w10: v1(23619.46,13227.84) U18.3@23619.46,13303.35
  Bottom Layer (.GBL) w10: v1(23619.46,13227.84) 23639.46,13247.84 R41.2@23639.46,13337.84 R42.2@23639.46,13402.84
NetR45_1: R45.1 R46.2 U14.4 | length 135.2
  Top Layer (.GTL) w10: U14.4@18596.47,12446.02 18596.98,12445.51 R45.1@18731.46,12445.51
NetR47_2: R47.2 U15.6 | length 631.5
  Top Layer (.GTL) w10: R47.2@18361.46,12540.51 18416.24,12540.51 v1(18416.46,12540.74) ; v1(18916.46,12562.74) U15.6@18916.46,12630
  Bottom Layer (.GBL) w10: v1(18416.46,12540.74) 18894.46,12540.74 v1(18916.46,12562.74)
NetU2A_6: U2A.6 U3A.2 U3A.4 | length 361.8
  Top Layer (.GTL) w10: v1(18781.98,14293.7) 18804.02,14271.65 U2A.6@18849.89,14271.65
  Bottom Layer (.GBL) w10: v1(18781.98,14293.7) 18783.57,14295.3 18783.57,14361.99 18781.98,14363.58 ; U3A.4@18849.89,14349.61 18845.76,14353.74 18791.82,14353.74 18781.98,14363.58 ; U3A.2@18849.89,14449.61 18805.99,14449.61 18781.98,14425.59 18781.98,14363.58
NetU2B_6: U2B.6 U3B.2 U3B.4 | length 361.8
  Top Layer (.GTL) w10: v1(19667.8,14293.7) 19689.85,14271.65 U2B.6@19735.72,14271.66
  Bottom Layer (.GBL) w10: v1(19667.8,14293.7) 19669.4,14295.3 19669.4,14361.99 19667.8,14363.58 ; U3B.4@19735.72,14349.61 19731.58,14353.74 19677.65,14353.74 19667.8,14363.58 ; U3B.2@19735.72,14449.61 19691.82,14449.61 19667.8,14425.59 19667.8,14363.58
NetU2C_6: U2C.6 U3C.2 U3C.4 | length 361.8
  Top Layer (.GTL) w10: v1(20553.63,14293.7) 20575.68,14271.65 U2C.6@20621.54,14271.65
  Bottom Layer (.GBL) w10: v1(20553.63,14293.7) 20555.22,14295.3 20555.22,14361.99 20553.63,14363.58 ; U3C.4@20621.54,14349.61 20617.41,14353.74 20563.47,14353.74 20553.63,14363.58 ; U3C.2@20621.54,14449.61 20577.65,14449.61 20553.63,14425.59 20553.63,14363.58
NetU2D_6: U2D.6 U3D.2 U3D.4 | length 361.8
  Top Layer (.GTL) w10: v1(21439.46,14293.7) 21461.5,14271.65 U2D.6@21507.37,14271.65
  Bottom Layer (.GBL) w10: v1(21439.46,14293.7) 21441.05,14295.3 21441.05,14361.99 21439.46,14363.58 ; U3D.4@21507.37,14349.61 21503.24,14353.74 21449.3,14353.74 21439.46,14363.58 ; U3D.2@21507.37,14449.61 21463.47,14449.61 21439.46,14425.59 21439.46,14363.58
NetU2E_6: U2E.6 U3E.2 U3E.4 | length 361.8
  Top Layer (.GTL) w10: v1(22325.28,14293.7) 22347.33,14271.65 U2E.6@22393.2,14271.66
  Bottom Layer (.GBL) w10: v1(22325.28,14293.7) 22326.88,14295.3 22326.88,14361.99 22325.28,14363.58 ; U3E.4@22393.2,14349.61 22389.06,14353.74 22335.13,14353.74 22325.28,14363.58 ; U3E.2@22393.2,14449.61 22349.3,14449.61 22325.28,14425.59 22325.28,14363.58
NetU2F_6: U2F.6 U3F.2 U3F.4 | length 361.8
  Top Layer (.GTL) w10: v1(18781.98,13703.15) 18804.02,13681.1 U2F.6@18849.89,13681.1
  Bottom Layer (.GBL) w10: v1(18781.98,13703.15) 18783.57,13704.74 18783.57,13771.44 18781.98,13773.03 ; U3F.4@18849.89,13759.05 18845.76,13763.19 18791.82,13763.19 18781.98,13773.03 ; U3F.2@18849.89,13859.05 18805.99,13859.05 18781.98,13835.04 18781.98,13773.03
NetU2G_6: U2G.6 U3G.2 U3G.4 | length 361.8
  Top Layer (.GTL) w10: v1(19667.8,13703.15) 19689.85,13681.1 U2G.6@19735.72,13681.1
  Bottom Layer (.GBL) w10: v1(19667.8,13703.15) 19669.4,13704.74 19669.4,13771.44 19667.8,13773.03 ; U3G.4@19735.72,13759.05 19731.58,13763.19 19677.65,13763.19 19667.8,13773.03 ; U3G.2@19735.72,13859.05 19691.82,13859.05 19667.8,13835.04 19667.8,13773.03
NetU2H_6: U2H.6 U3H.2 U3H.4 | length 361.8
  Top Layer (.GTL) w10: v1(20553.63,13703.15) 20575.68,13681.1 U2H.6@20621.54,13681.1
  Bottom Layer (.GBL) w10: v1(20553.63,13703.15) 20555.22,13704.74 20555.22,13771.44 20553.63,13773.03 ; U3H.4@20621.54,13759.05 20617.41,13763.19 20563.47,13763.19 20553.63,13773.03 ; U3H.2@20621.54,13859.05 20577.65,13859.05 20553.63,13835.04 20553.63,13773.03
NetU2I_6: U2I.6 U3I.2 U3I.4 | length 361.8
  Top Layer (.GTL) w10: v1(21439.46,13703.15) 21461.5,13681.1 U2I.6@21507.37,13681.1
  Bottom Layer (.GBL) w10: v1(21439.46,13703.15) 21441.05,13704.74 21441.05,13771.44 21439.46,13773.03 ; U3I.4@21507.37,13759.05 21503.24,13763.19 21449.3,13763.19 21439.46,13773.03 ; U3I.2@21507.37,13859.05 21463.47,13859.05 21439.46,13835.04 21439.46,13773.03
NetU2J_6: U2J.6 U3J.2 U3J.4 | length 361.8
  Top Layer (.GTL) w10: v1(22325.28,13703.15) 22347.33,13681.1 U2J.6@22393.2,13681.1
  Bottom Layer (.GBL) w10: v1(22325.28,13703.15) 22326.88,13704.74 22326.88,13771.44 22325.28,13773.03 ; U3J.4@22393.2,13759.05 22389.06,13763.19 22335.13,13763.19 22325.28,13773.03 ; U3J.2@22393.2,13859.05 22349.3,13859.05 22325.28,13835.04 22325.28,13773.03
NetU2K_6: U2K.6 U3K.2 U3K.4 | length 361.8
  Top Layer (.GTL) w10: v1(18781.98,13132.28) 18804.02,13110.24 U2K.6@18849.89,13110.24
  Bottom Layer (.GBL) w10: v1(18781.98,13132.28) 18783.57,13133.88 18783.57,13200.57 18781.98,13202.16 ; U3K.4@18849.89,13188.19 18845.76,13192.32 18791.82,13192.32 18781.98,13202.16 ; U3K.2@18849.89,13288.19 18805.99,13288.19 18781.98,13264.17 18781.98,13202.16
NetU2L_6: U2L.6 U3L.2 U3L.4 | length 361.8
  Top Layer (.GTL) w10: v1(19667.8,13132.28) 19689.85,13110.24 U2L.6@19735.72,13110.24
  Bottom Layer (.GBL) w10: v1(19667.8,13132.28) 19669.4,13133.88 19669.4,13200.57 19667.8,13202.16 ; U3L.4@19735.72,13188.19 19731.58,13192.32 19677.65,13192.32 19667.8,13202.16 ; U3L.2@19735.72,13288.19 19691.82,13288.19 19667.8,13264.17 19667.8,13202.16
NetU2M_6: U2M.6 U3M.2 U3M.4 | length 361.8
  Top Layer (.GTL) w10: v1(20553.63,13132.28) 20575.68,13110.24 U2M.6@20621.54,13110.24
  Bottom Layer (.GBL) w10: v1(20553.63,13132.28) 20555.22,13133.88 20555.22,13200.57 20553.63,13202.16 ; U3M.4@20621.54,13188.19 20617.41,13192.32 20563.47,13192.32 20553.63,13202.16 ; U3M.2@20621.54,13288.19 20577.65,13288.19 20553.63,13264.17 20553.63,13202.16
NetU2N_6: U2N.6 U3N.2 U3N.4 | length 361.8
  Top Layer (.GTL) w10: v1(21439.46,13132.28) 21461.5,13110.24 U2N.6@21507.37,13110.24
  Bottom Layer (.GBL) w10: v1(21439.46,13132.28) 21441.05,13133.88 21441.05,13200.57 21439.46,13202.16 ; U3N.4@21507.37,13188.19 21503.24,13192.32 21449.3,13192.32 21439.46,13202.16 ; U3N.2@21507.37,13288.19 21463.47,13288.19 21439.46,13264.17 21439.46,13202.16
NetU2O_6: U2O.6 U3O.2 U3O.4 | length 361.8
  Top Layer (.GTL) w10: v1(22325.28,13132.28) 22347.33,13110.24 U2O.6@22393.2,13110.24
  Bottom Layer (.GBL) w10: v1(22325.28,13132.28) 22326.88,13133.88 22326.88,13200.57 22325.28,13202.16 ; U3O.4@22393.2,13188.19 22389.06,13192.32 22335.13,13192.32 22325.28,13202.16 ; U3O.2@22393.2,13288.19 22349.3,13288.19 22325.28,13264.17 22325.28,13202.16
NetU5A_6: U5A.6 U6A.2 | length 788.5
  MidLayer1 (*.G1) w10: v1(18740.4,15028.31) 18779.4,14989.31 18779.4,14964.61 18920.7,14823.31 v1(19290.4,14823.31)
  Bottom Layer (.GBL) w10: v1(18740.4,15028.31) 18750.4,15038.31 U6A.2@18750.4,15089.76 ; v1(19290.4,14823.31) U5A.6@19290.4,14896.85
NetU5B_6: U5B.6 U6B.2 | length 788.5
  MidLayer1 (*.G1) w10: v1(19813.24,15028.31) 19852.24,14989.31 19852.24,14964.61 19993.54,14823.31 v1(20363.24,14823.31)
  Bottom Layer (.GBL) w10: v1(19813.24,15028.31) 19823.24,15038.31 U6B.2@19823.24,15089.76 ; v1(20363.24,14823.31) U5B.6@20363.24,14896.85
NetU5C_6: U5C.6 U6C.2 | length 788.5
  MidLayer1 (*.G1) w10: v1(20886.07,15028.31) 20925.07,14989.31 20925.07,14964.61 21066.37,14823.31 v1(21436.07,14823.31)
  Bottom Layer (.GBL) w10: v1(20886.07,15028.31) 20896.07,15038.31 U6C.2@20896.07,15089.76 ; v1(21436.07,14823.31) U5C.6@21436.07,14896.85
NetU5D_6: U5D.6 U6D.2 | length 788.5
  MidLayer1 (*.G1) w10: v1(21958.91,15028.31) 21997.91,14989.31 21997.91,14964.61 22139.21,14823.31 v1(22508.91,14823.31)
  Bottom Layer (.GBL) w10: v1(21958.91,15028.31) 21968.91,15038.31 U6D.2@21968.91,15089.76 ; v1(22508.91,14823.31) U5D.6@22508.91,14896.85
NetU6A_4: U6A.4 U7A.6 | length 471.5
  Top Layer (.GTL) w10: v1(19155.4,14848.31) U7A.6@19221.86,14848.31
  MidLayer1 (*.G1) w10: v1(18875.4,15083.31) 19110.4,14848.31 v1(19155.4,14848.31)
  Bottom Layer (.GBL) w10: U6A.4@18850.4,15089.76 18856.86,15083.31 v1(18875.4,15083.31)
NetU6B_4: U6B.4 U7B.6 | length 471.5
  Top Layer (.GTL) w10: v1(20228.24,14848.31) U7B.6@20294.69,14848.31
  MidLayer1 (*.G1) w10: v1(19948.24,15083.31) 20183.24,14848.31 v1(20228.24,14848.31)
  Bottom Layer (.GBL) w10: U6B.4@19923.24,15089.76 19929.69,15083.31 v1(19948.24,15083.31)
NetU6C_4: U6C.4 U7C.6 | length 471.5
  Top Layer (.GTL) w10: v1(21301.07,14848.31) U7C.6@21367.53,14848.31
  MidLayer1 (*.G1) w10: v1(21021.07,15083.31) 21256.07,14848.31 v1(21301.07,14848.31)
  Bottom Layer (.GBL) w10: U6C.4@20996.07,15089.76 21002.53,15083.31 v1(21021.07,15083.31)
NetU6D_4: U6D.4 U7D.6 | length 471.5
  Top Layer (.GTL) w10: v1(22373.91,14848.31) U7D.6@22440.36,14848.31
  MidLayer1 (*.G1) w10: v1(22093.91,15083.31) 22328.91,14848.31 v1(22373.91,14848.31)
  Bottom Layer (.GBL) w10: U6D.4@22068.91,15089.76 22075.36,15083.31 v1(22093.91,15083.31)
NetU12_7: U12.7 U12.8 | length 165.8
  Top Layer (.GTL) w10: U12.8@23617,13869.49 23617,13921.77 23628.46,13933.23 23658.46,13933.23 23667,13924.68 U12.7@23667,13869.49
NetU13_2: U13.2 U13.4 | length 104.9
  Top Layer (.GTL) w5: U13.4@23287.74,15942.7 23260.3,15942.7 23249,15954 23249,15973 23258.07,15982.07 U13.2@23287.74,15982.07
NetU16_2: U16.2 U16.4 | length 111
  Top Layer (.GTL) w5: U16.4@23278.74,15265.96 23247.04,15265.96 23239,15274 23239,15300 23244.33,15305.33 U16.2@23278.74,15305.33
NetU18_7: U18.7 U18.8 | length 200.5
  Top Layer (.GTL) w10: U18.8@23519.46,13492.32 23519.46,13562.84 v1(23534.46,13577.84) 23549.46,13577.84 23569.46,13557.83 U18.7@23569.46,13492.32
P1: J1.19 U9.55 | length 3215.4
  Top Layer (.GTL) w5: J1.19@21684.5,12389.15 21684.5,12533.67 21780.34,12629.5 21805.81,12629.5 22042.18,12865.87 22436.04,12865.87 22471.91,12830 22512,12830 22660.07,12830 22706.5,12876.43 22706.5,13019.41 23492,13804.91 23492,13865.46 23492,13872.91 23719,14099.91 23719,14136.09 23651.94,14203.15 U9.55@23548.67,14203.15
P2: J1.14 U9.40 | length 2674.4
  Top Layer (.GTL) w5: U9.40@23291.78,14064.37 23291.78,14007.76 23321,13978.54 v1(23321,13927)
  Bottom Layer (.GBL) w5: J1.14@21759.5,12389.15 21759.5,12508.4 21849.61,12598.5 21870.59,12598.5 22062.09,12790 22622.09,12790 22777,12944.91 22777,13122.91 23321,13666.91 v1(23321,13927)
P3: J1.16 U9.39 | length 2675.6
  Top Layer (.GTL) w5: U9.39@23272.09,14064.37 23272.09,14010.62 23300,13982.72 v1(23300,13895)
  Bottom Layer (.GBL) w5: J1.16@21734.5,12389.15 21734.5,12496.12 21845.88,12607.5 21866.86,12607.5 22058.36,12799 22618.36,12799 22768,12948.64 22768,13126.64 23300,13658.64 v1(23300,13895)
PH_CLK1: P3.2 R1F.1 U9.81 | length 7664.6
  Top Layer (.GTL) w5: v1(22780,14842) 22778,14840 22961.45,14840 22985.45,14864 23222.2,14864 23390.2,14696 U9.81@23390.2,14656.89
  MidLayer1 (*.G1) w5: v1(22780,14842) 22944.45,14842 22982.45,14880 23812.97,14880 23817.24,14884.27 23872.27,14884.27 23909,14921 23909,14929.84 23863,14975.84 P3.2@23863,14995
  MidLayer2 (*.G2) w5: v1(18721,13418) v1(22779,13418)
  MidLayer3 (*.G3) w5: v1(18721,13418) 18723,13420 v1(18723,13566) ; v1@22780,13419 v1(22780,14842)
  Bottom Layer (.GBL) w10: R1F.1@18721.94,13611.89 18721.94,13567.06 v1(18723,13566)
PH_CLK2: P3.4 R1G.1 U9.82 | length 6838.5
  Top Layer (.GTL) w5: v1(22761,14820) 22760,14819 22953.18,14819 22989.18,14855 23211.52,14855 23370.52,14696 U9.82@23370.52,14656.89
  MidLayer1 (*.G1) w5: v1(22761,14820) 22935.18,14820 22986.18,14871 23816.7,14871 23820.97,14875.27 23876,14875.27 23918,14917.27 23918,14933.57 23899.97,14951.6 23899.97,15038.4 23908.97,15047.4 23908.97,15049.03 P3.4@23863,15095
  MidLayer2 (*.G2) w5: v1(19607,13438) 22744.5,13438 v1(22761.5,13455)
  MidLayer3 (*.G3) w5: v1(19606,13567) 19606,13451 v1(19607,13438) ; v1(22761,14820) 22761.5,14819.5 v1(22761.5,13455)
  Bottom Layer (.GBL) w10: v1(19606,13567) 19607.76,13568.76 R1G.1@19607.76,13611.89
PH_CLK3: P3.6 R1H.1 U9.83 | length 5974.7
  Top Layer (.GTL) w5: v1(22743,14798) 22944.9,14798 22992.9,14846 23200.83,14846 23350.83,14696 U9.83@23350.83,14656.89
  MidLayer1 (*.G1) w5: v1(22743,14798) 22925.9,14798 22989.9,14862 23820.43,14862 23824.7,14866.27 23879.73,14866.27 23927,14913.54 23927,14937.3 23908.97,14955.32 23908.97,15034.68 23917.97,15043.68 23917.97,15140.03 P3.6@23863,15195
  MidLayer2 (*.G2) w5: v1(20494,13481) 22742,13481 v1(22743,13480)
  MidLayer3 (*.G3) w5: v1(20494,13481) v1(20494,13563) ; v1(22743,13480) v1(22743,14798)
  Bottom Layer (.GBL) w10: R1H.1@20493.59,13611.89 20493.59,13563.41 v1(20494,13563)
PH_CLK4: P3.8 R1I.1 U9.84 | length 5133
  Top Layer (.GTL) w5: v1(22721,14777) 22936.63,14777 22996.63,14837 23190.15,14837 23331.15,14696 U9.84@23331.15,14656.89
  MidLayer1 (*.G1) w5: v1(22721,14777) 22917.63,14777 22993.63,14853 23824.15,14853 23828.43,14857.27 23883.46,14857.27 23936,14909.82 23936,14941.02 23917.97,14959.05 23917.97,15030.95 23926.97,15039.95 23926.97,15231.03 P3.8@23863,15295
  MidLayer2 (*.G2) w5: v1(21379,13512) v1(22721,13512)
  MidLayer3 (*.G3) w5: v1(21379,13512) 21380,13513 v1(21380,13567) ; v1(22721,13512) v1(22721,14777)
  Bottom Layer (.GBL) w10: R1I.1@21379.42,13611.89 21379.42,13567.58 v1(21380,13567)
PH_CLK5: P3.3 R1J.1 U9.85 | length 3958.5
  Top Layer (.GTL) w5: v1(22694,14756) 22958.18,14756 22974,14771.82 22974,14801.64 23000.36,14828 23179.46,14828 23311.46,14696 U9.85@23311.46,14656.89
  MidLayer1 (*.G1) w5: v1(22694,14756) 22909.36,14756 22997.36,14844 23827.88,14844 23832.15,14848.27 23887.18,14848.27 23945,14906.09 23945,14944.75 23926.97,14962.78 23926.97,15027.22 23963,15063.25 P3.3@23963,15095
  MidLayer2 (*.G2) w5: v1(22264,13565) 22689,13565 v1(22694,13560)
  MidLayer3 (*.G3) w5: v1(22694,13560) v1(22694,14756)
  Bottom Layer (.GBL) w10: v1(22264,13565) 22265.24,13566.24 R1J.1@22265.24,13611.89
PH_CLK6: P3.13 R1K.1 U9.76 | length 8367.2
  Top Layer (.GTL) w5: v1(22841,14903) 22969.72,14903 22981.72,14891 23293.63,14891 23488.63,14696 U9.76@23488.63,14656.89
  MidLayer1 (*.G1) w5: v1(22841,14903) 22869,14903 22873,14907 23510.36,14907 23808.97,15205.61 23808.97,15491.92 23876.02,15558.97 23877.92,15558.97 23913.95,15595 P3.13@23963,15595
  MidLayer2 (*.G2) w5: v1(18720,12991) 18726,12991 18774,12943 22611,12943 v1(22612,12944)
  MidLayer3 (*.G3) w5: v1@22611,12943 22611,13162.72 22841,13392.72 v1(22841,14903)
  Bottom Layer (.GBL) w10: v1(18720,12991) 18721.94,12992.94 R1K.1@18721.94,13041.02
PH_CLK7: P3.12 R1L.1 U9.77 | length 7264
  Top Layer (.GTL) w5: v1(22821,14882) 23282.94,14882 23468.94,14696 U9.77@23468.94,14656.89
  MidLayer1 (*.G1) w5: v1(22821,14882) 22958.99,14882 22974.99,14898 23514.09,14898 23817.97,15201.89 23817.97,15449.97 P3.12@23863,15495
  MidLayer2 (*.G2) w5: v1(19607,12995) 19608,12995 19641,12962 22590,12962 v1(22591,12963)
  MidLayer3 (*.G3) w5: v1(22591,12963) 22591,13171 22821,13401 v1(22821,14882)
  Bottom Layer (.GBL) w10: v1(19607,12995) 19607.76,12995.76 R1L.1@19607.76,13041.02
PH_CLK8: P3.14 R1M.1 U9.75 | length 6919.6
  Top Layer (.GTL) w5: v1(22862,14924) 22961.45,14924 22985.45,14900 23460.46,14900 23474.7,14885.76 23527.3,14885.76 23541.54,14900 23571,14900 23599,14872 23599,14607.85 23588,14596.85 U9.75@23548.67,14596.85
  MidLayer1 (*.G1) w5: v1(22862,14924) 22967,14924 22975,14916 23506.63,14916 23799.97,15209.34 23799.97,15531.97 P3.14@23863,15595
  MidLayer2 (*.G2) w5: v1(20490,12923) v1(22632,12923)
  MidLayer3 (*.G3) w5: v1(20490,12923) v1(20493,12999) ; v1(22632,12923) 22632,13154.02 22850.66,13372.67 22850.66,13772.65 22850.48,13772.83 22850.48,14886.31 22859.5,14895.34 v1@22859.5,14924
  Bottom Layer (.GBL) w10: v1(20493,12999) 20493.59,12999.59 R1M.1@20493.59,13041.02
PH_CLK9: P3.15 R1N.1 U9.74 | length 6293.3
  Top Layer (.GTL) w5: v1(22882,14945) 22953.18,14945 22989.18,14909 23464.19,14909 23478.43,14894.76 23523.57,14894.76 23537.81,14909 23574.73,14909 23608,14875.73 23608,14597.17 23588,14577.17 U9.74@23548.67,14577.17
  MidLayer1 (*.G1) w5: v1(22882,14945) 22961.18,14945 22981.18,14925 23502.9,14925 23790.97,15213.07 23790.97,15573.92 23876.02,15658.97 23877.92,15658.97 23913.95,15695 P3.15@23963,15695
  MidLayer2 (*.G2) w5: v1(21378,12899) v1(22652,12899)
  MidLayer3 (*.G3) w5: v1(21378,12899) v1(21379,12994) ; v1@22652,12895 v1(22652,12899) 22652,13145.73 22859.66,13353.39 22859.66,13776.38 22859.48,13776.55 22859.48,14882.59 22874.58,14897.69 22874.58,14910.42 22880.5,14916.34 v1@22880.5,14945
  Bottom Layer (.GBL) w10: v1(21379,12994) 21379.42,12994.42 R1N.1@21379.42,13041.02
PH_CLK10: P3.9 R1E.1 U9.90 | length 3695.6
  Top Layer (.GTL) w5: v1(22588,14651) 22916.82,14651 23019,14753.18 23019,14783 23126.04,14783 23213.04,14696 U9.90@23213.04,14656.89
  MidLayer1 (*.G1) w5: v1(22588,14651) 22868,14651 23016,14799 23846.52,14799 23850.79,14803.27 23880.64,14803.27 23884.91,14799 23901.55,14799 23990,14887.45 23990,14928.3 23993.68,14931.97 24006.4,14931.97 24026.03,14951.6 24026.03,15282.92 23963,15345.95 P3.9@23963,15395
  MidLayer2 (*.G2) w5: v1(22266,14156) v1(22588,14156)
  MidLayer3 (*.G3) w5: v1(22588,14156) v1(22588,14651)
  Bottom Layer (.GBL) w10: R1E.1@22265.24,14202.44 22265.24,14156.76 v1(22266,14156)
PH_CLK11: P3.11 R1O.1 U9.78 | length 4639.5
  Top Layer (.GTL) w5: v1(22800,14862) 22799,14861 22969.72,14861 22981.72,14873 23272.26,14873 23449.26,14696 U9.78@23449.26,14656.89
  MidLayer1 (*.G1) w5: v1(22800,14862) 22951.72,14862 22978.72,14889 23517.81,14889 23826.97,15198.16 23826.97,15409.92 23848.08,15431.03 23899.03,15431.03 P3.11@23963,15495
  MidLayer2 (*.G2) w5: v1(22264,12992) 22569,12992 v1(22570,12993)
  MidLayer3 (*.G3) w5: v1@22570,12992 v1(22570,12993) 22570,13179.7 22800,13409.7 v1(22800,14862)
  Bottom Layer (.GBL) w10: v1(22264,12992) 22265.24,12993.24 R1O.1@22265.24,13041.02